# EAGLE board Vernier_Interface_Shield-Panel-v12 (EAGLE 6.6.0)
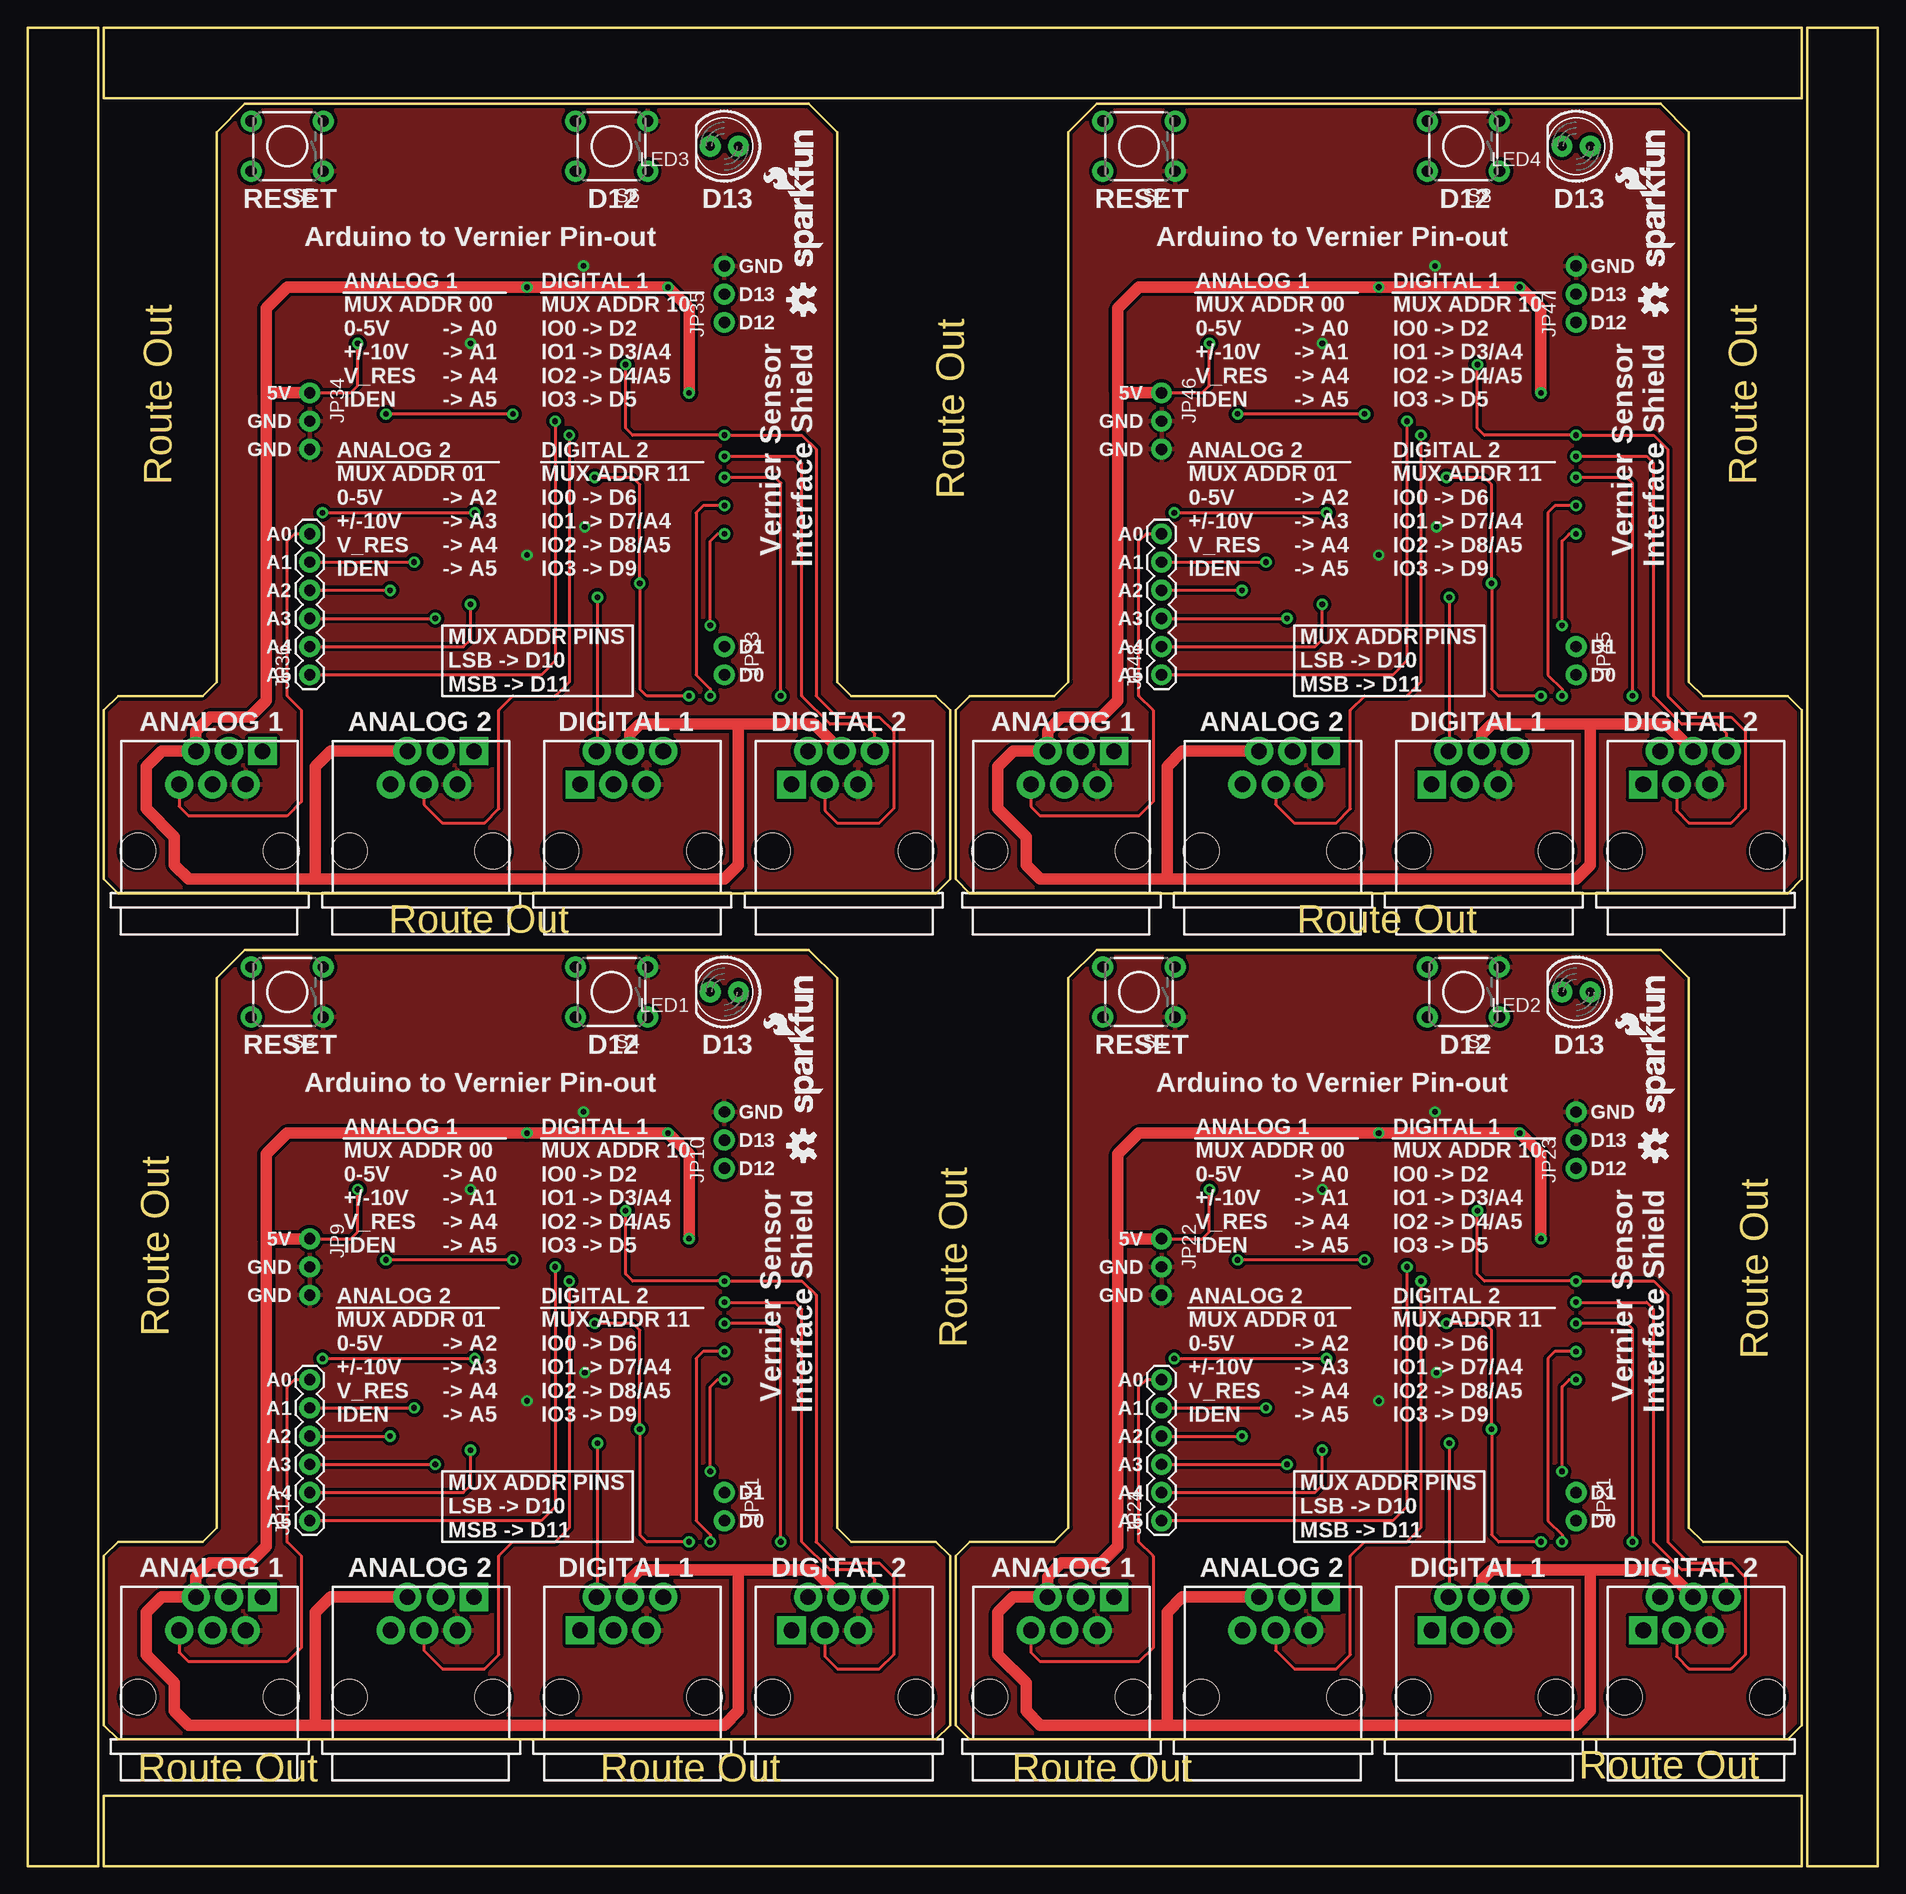
[diagram p0: board, top side]
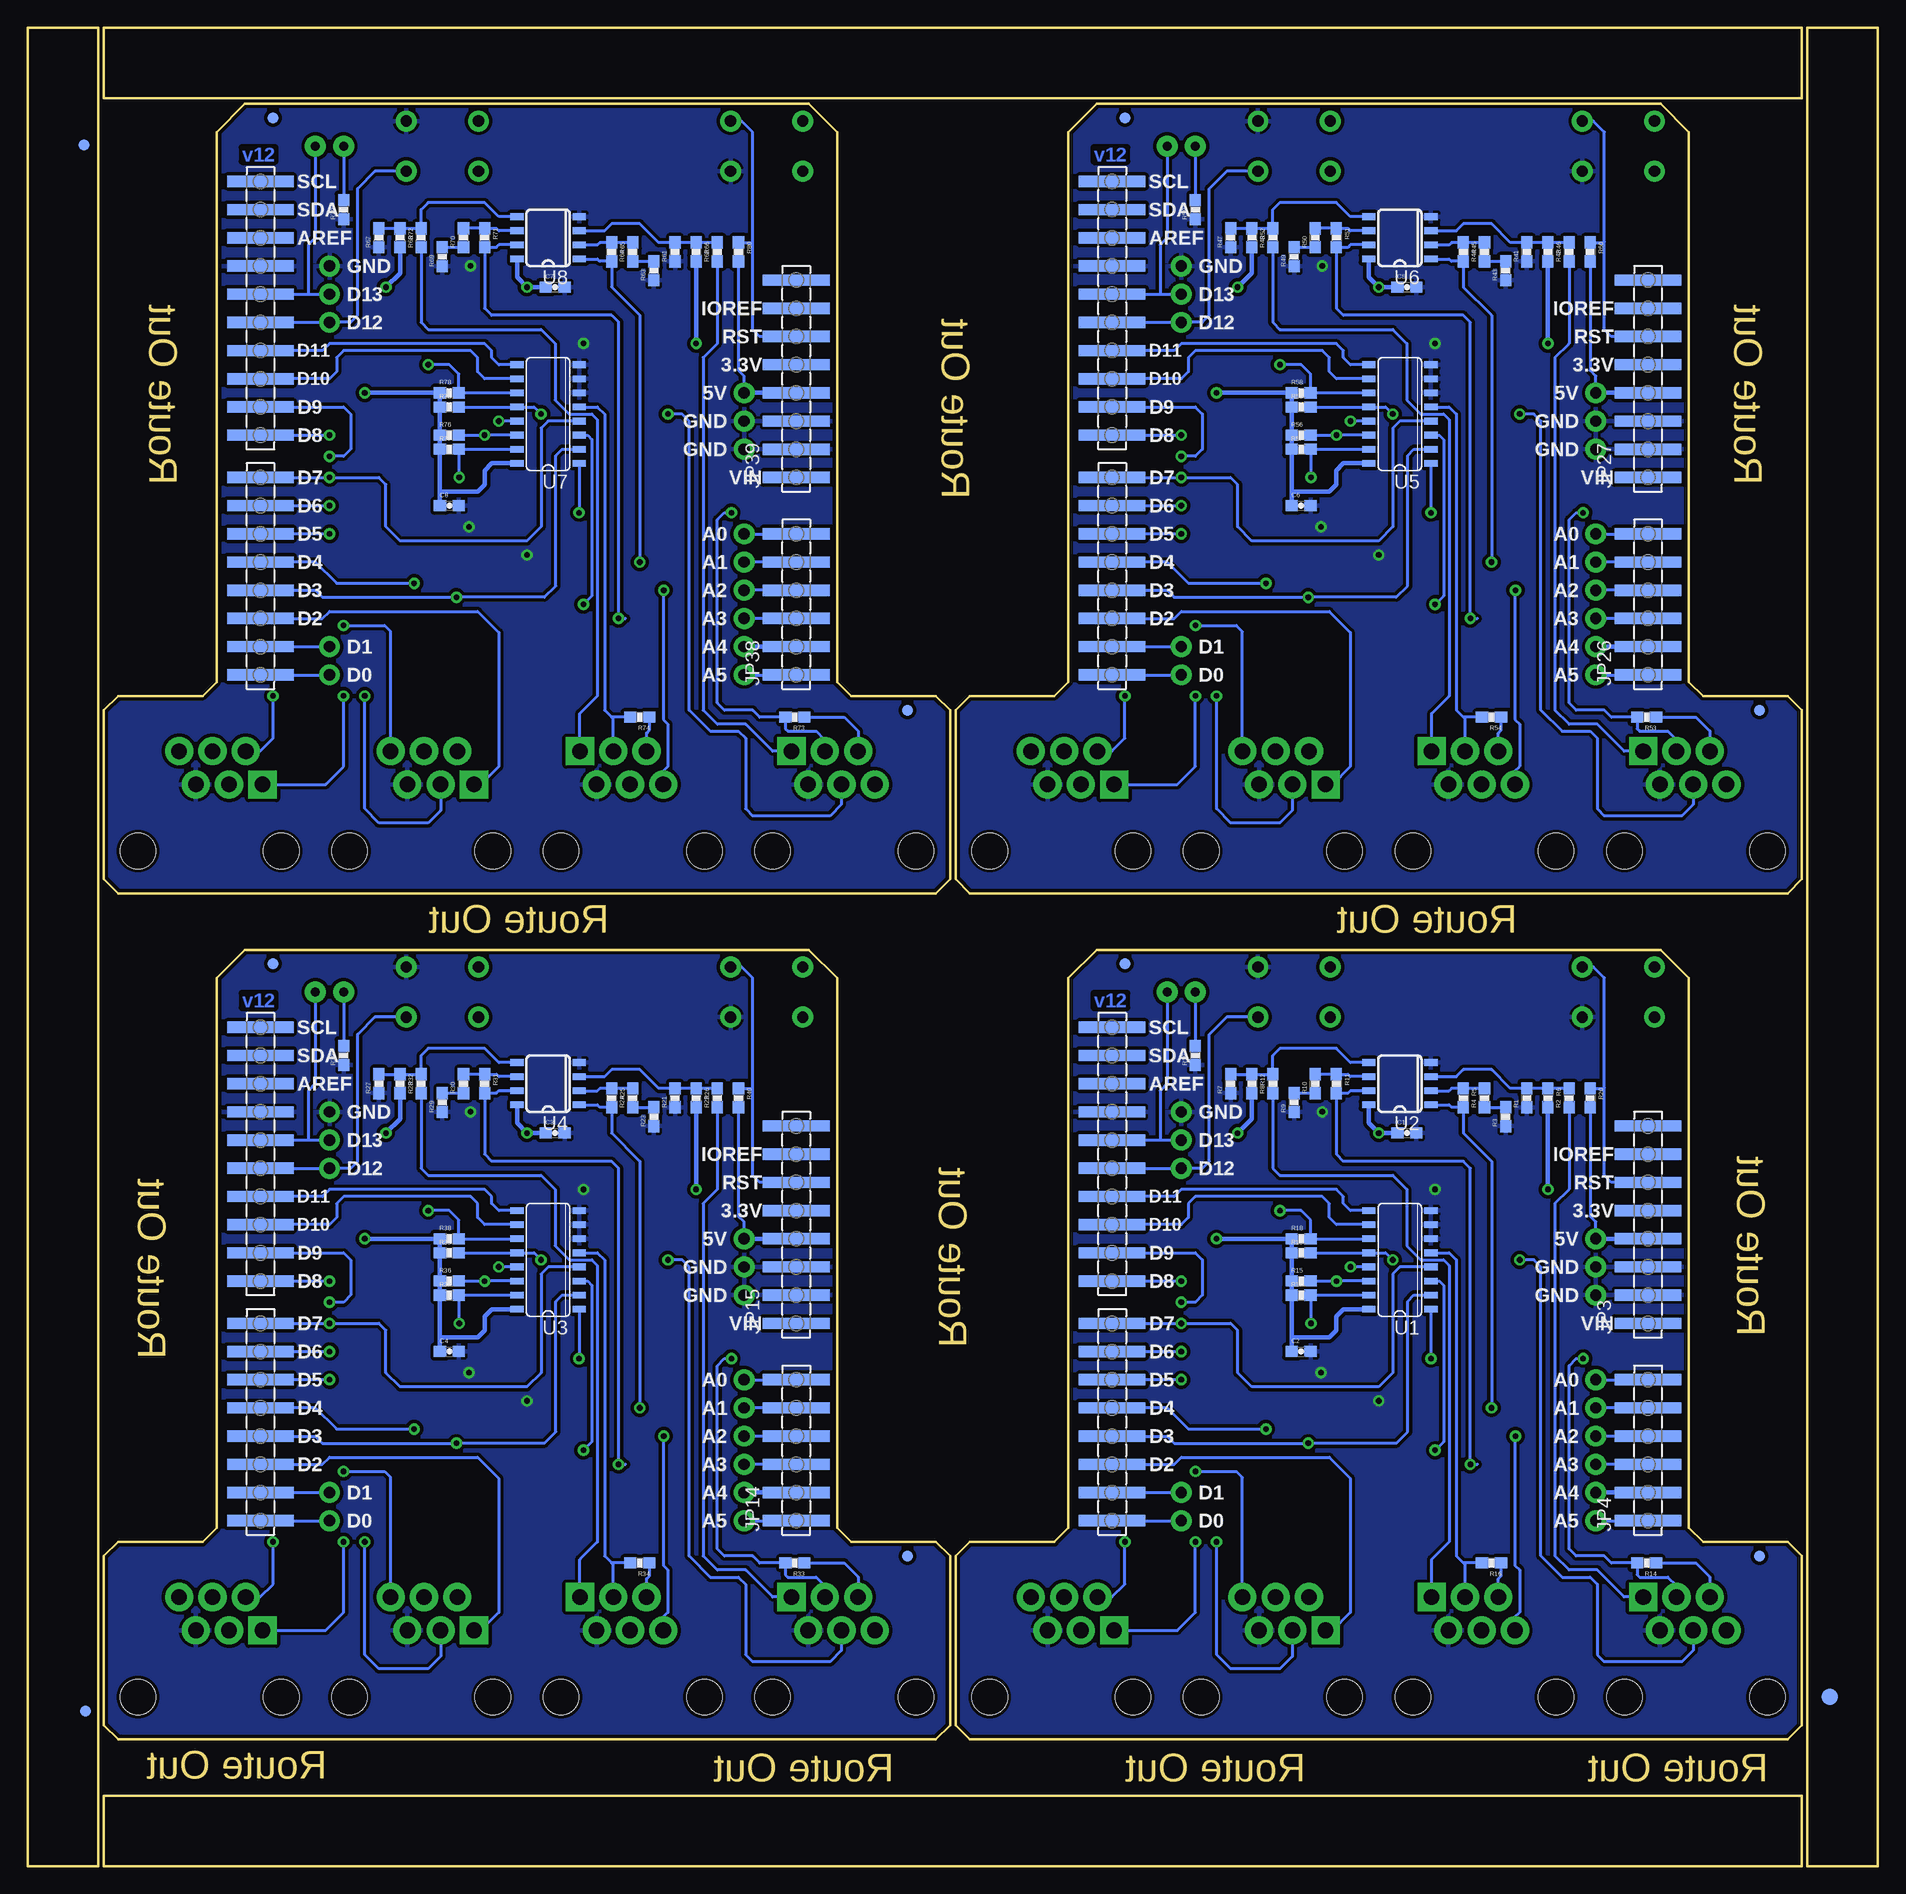
[diagram p1: board, bottom side, seen from below]

Size 166.62 x 165.61 mm. Coordinates in mm from the lower left corner, seen from the top.
Outline: 6.35,83.82 6.35,0 0,0 0,34.29
Outline: 166.62,85.09 166.62,0 160.27,0 160.27,35.56
Outline: 160.27,30.48 160.27,165.61 166.62,165.61 166.62,80.01
Outline: 0,32.77 0,165.61 6.35,165.61 6.35,82.3
Outline: 8.13,11.43 81.79,11.43 83.06,12.7 83.06,27.94 81.79,29.21 74.17,29.21 72.9,30.48 72.9,80.01 70.36,82.55 19.56,82.55 17.02,80.01 17.02,30.48 15.75,29.21 8.13,29.21 6.86,27.94 6.86,12.7 8.13,11.43
Outline: 84.84,11.43 158.5,11.43 159.77,12.7 159.77,27.94 158.5,29.21 150.88,29.21 149.61,30.48 149.61,80.01 147.07,82.55 96.27,82.55 93.73,80.01 93.73,30.48 92.46,29.21 84.84,29.21 83.57,27.94 83.57,12.7 84.84,11.43
Outline: 8.13,87.63 81.79,87.63 83.06,88.9 83.06,104.14 81.79,105.41 74.17,105.41 72.9,106.68 72.9,156.21 70.36,158.75 19.56,158.75 17.02,156.21 17.02,106.68 15.75,105.41 8.13,105.41 6.86,104.14 6.86,88.9 8.13,87.63
Outline: 84.84,87.63 158.5,87.63 159.77,88.9 159.77,104.14 158.5,105.41 150.88,105.41 149.61,106.68 149.61,156.21 147.07,158.75 96.27,158.75 93.73,156.21 93.73,106.68 92.46,105.41 84.84,105.41 83.57,104.14 83.57,88.9 84.84,87.63
Outline: 6.86,6.35 6.86,0 159.77,0 159.77,6.35 6.86,6.35
Outline: 159.77,159.26 159.77,165.61 6.86,165.61 6.86,159.26 159.77,159.26
Copper layers (1*16): Top 0.035mm / dielectric 1.5mm / Bottom 0.035mm
Design rules "SparkFun-2-layer": minimum track width 7mil, minimum drill 15mil, track to track 8mil, track to pad 8mil, pad to pad 8mil, via to via 8mil, smd to smd 8mil, copper to edge 8mil, drill to drill 8mil, minimum pad ring 12mil, minimum via ring 10mil, stop-mask expansion 4mil, vias tented up to drill 20mil, thermal gap 10mil

## Footprints (pad centres in the part's own frame; a part is rotated, then mirrored left to right if it is on the bottom)
0603-CAP = smd 1.1 x 1: 1 -0.85,0; 2 0.85,0
FIDUCIAL-1.5X3 = smd 1.5 x 1.5: 1 0,0
FIDUCIAL-1X2 = smd 1 x 1: 1 0,0
1X10_SMD_MALE = smd 1.02 x 6: 1 0,0; 2 2.54,0; 3 5.08,0; 4 7.62,0; 5 10.16,0; 6 12.7,0; 7 15.24,0; 8 17.78,0; 9 20.32,0; 10 22.86,0
1X08_SMD_MALE = smd 1.02 x 6: 1 0,0; 2 2.54,0; 3 5.08,0; 4 7.62,0; 5 10.16,0; 6 12.7,0; 7 15.24,0; 8 17.78,0
1X06_SMD_MALE = smd 1.02 x 6: 1 0,0; 2 2.54,0; 3 5.08,0; 4 7.62,0; 5 10.16,0; 6 12.7,0
BTA = drill 1.4 pad 2.54 square: 1 4.75,9 | drill 1.4 pad 2.54: 2 3.25,6; 3 1.75,9; 4 0.25,6; 5 -1.25,9; 6 -2.75,6 | hole 3.2: 6.45,0; -6.45,0
BTD = drill 1.4 pad 2.54 square: 1 -4.75,6 | drill 1.4 pad 2.54: 2 -3.25,9; 3 -1.75,6; 4 -0.25,9; 5 1.25,6; 6 2.75,9 | hole 3.2: 6.45,0; -6.45,0
1X03_NO_SILK = drill 1.016 pad 1.88: 1 0,0; 2 2.54,0; 3 5.08,0
1X02_NO_SILK = drill 1.016 pad 1.88: 1 0,0; 2 2.54,0
1X06 = drill 1.016 pad 1.88: 1 0,0; 2 2.54,0; 3 5.08,0; 4 7.62,0; 5 10.16,0; 6 12.7,0
LED5MM = drill 0.813 pad 1.88: A -1.27,0; K 1.27,0
0603-RES = smd 1.1 x 1: 1 -0.85,0; 2 0.85,0
TACTILE-PTH = drill 1.016 pad 1.88: 1 -3.251,2.261; 2 3.251,2.261; 3 -3.251,-2.261; 4 3.251,-2.261
SO16 = smd 0.6 x 1.2: 1 -4.445,-2.8; 2 -3.175,-2.8; 3 -1.905,-2.8; 4 -0.635,-2.8; 5 0.635,-2.8; 6 1.905,-2.8; 7 3.175,-2.8; 8 4.445,-2.8; 9 4.445,2.8; 10 3.175,2.8; 11 1.905,2.8; 12 0.635,2.8; 13 -0.635,2.8; 14 -1.905,2.8; 15 -3.175,2.8; 16 -4.445,2.8
SO08-TIGHT = smd 0.6 x 1.2: 1 -1.905,-2.8; 2 -0.635,-2.8; 3 0.635,-2.8; 4 1.905,-2.8; 5 1.905,2.8; 6 0.635,2.8; 7 -0.635,2.8; 8 -1.905,2.8

## Placement (x,y rotation side)
C1  0.1uF  [0603-CAP]  42.42,66.04 0 bottom
C2  0.1uF  [0603-CAP]  51.94,46.35 0 bottom
C3  0.1uF  [0603-CAP]  119.13,66.04 0 bottom
C4  0.1uF  [0603-CAP]  128.65,46.35 0 bottom
C5  0.1uF  [0603-CAP]  42.42,142.24 0 bottom
C6  0.1uF  [0603-CAP]  51.94,122.56 0 bottom
C7  0.1uF  [0603-CAP]  119.13,142.24 0 bottom
C8  0.1uF  [0603-CAP]  128.65,122.56 0 bottom
E$1  [FIDUCIAL-1.5X3]  4.32,15.24 0 bottom
E$4  [FIDUCIAL-1X2]  161.42,13.97 0 bottom
E$6  [FIDUCIAL-1X2]  161.54,155.07 270 bottom
FID1  FIDUCIAL1X2  [FIDUCIAL-1X2]  10.67,27.94 0 bottom
FID2  FIDUCIAL1X2  [FIDUCIAL-1X2]  67.82,81.28 0 bottom
FID3  FIDUCIAL1X2  [FIDUCIAL-1X2]  87.38,27.94 0 bottom
FID4  FIDUCIAL1X2  [FIDUCIAL-1X2]  144.53,81.28 0 bottom
FID5  FIDUCIAL1X2  [FIDUCIAL-1X2]  10.67,104.14 0 bottom
FID6  FIDUCIAL1X2  [FIDUCIAL-1X2]  67.82,157.48 0 bottom
FID7  FIDUCIAL1X2  [FIDUCIAL-1X2]  87.38,104.14 0 bottom
FID8  FIDUCIAL1X2  [FIDUCIAL-1X2]  144.53,157.48 0 bottom
JP1  Male  [1X10_SMD_MALE]  68.96,52.7 90 bottom
JP2  Male  [1X08_SMD_MALE]  68.96,31.11 90 bottom
JP3  Male  [1X08_SMD_MALE]  20.7,48.9 90 bottom
JP4  Male  [1X06_SMD_MALE]  20.7,31.11 90 bottom
JP5  BTA  [BTA]  16.38,15.24 0 top
JP6  BTA  [BTA]  35.43,15.24 0 top
JP7  BTD  [BTD]  54.48,15.24 0 top
JP8  BTD  [BTD]  73.53,15.24 0 top
JP9  [1X03_NO_SILK]  25.4,56.52 270 top
JP10  [1X03_NO_SILK]  62.74,62.87 90 top
JP11  M021X02_NO_SILK  [1X02_NO_SILK]  62.74,33.66 270 top
JP12  Male  [1X06]  25.4,31.11 90 top
JP13  Male  [1X10_SMD_MALE]  145.67,52.7 90 bottom
JP14  Male  [1X06_SMD_MALE]  97.41,31.11 90 bottom
JP15  Male  [1X08_SMD_MALE]  97.41,48.9 90 bottom
JP16  Male  [1X08_SMD_MALE]  145.67,31.11 90 bottom
JP17  BTD  [BTD]  131.19,15.24 0 top
JP18  BTA  [BTA]  93.09,15.24 0 top
JP19  BTA  [BTA]  112.14,15.24 0 top
JP20  BTD  [BTD]  150.24,15.24 0 top
JP21  M021X02_NO_SILK  [1X02_NO_SILK]  139.45,33.66 270 top
JP22  [1X03_NO_SILK]  102.11,56.52 270 top
JP23  [1X03_NO_SILK]  139.45,62.87 90 top
JP24  Male  [1X06]  102.11,31.11 90 top
JP25  Male  [1X10_SMD_MALE]  68.96,128.91 90 bottom
JP26  Male  [1X06_SMD_MALE]  20.7,107.31 90 bottom
JP27  Male  [1X08_SMD_MALE]  20.7,125.09 90 bottom
JP28  Male  [1X08_SMD_MALE]  68.96,107.31 90 bottom
JP29  BTD  [BTD]  54.48,91.44 0 top
JP30  BTA  [BTA]  16.38,91.44 0 top
JP31  BTA  [BTA]  35.43,91.44 0 top
JP32  BTD  [BTD]  73.53,91.44 0 top
JP33  M021X02_NO_SILK  [1X02_NO_SILK]  62.74,109.86 270 top
JP34  [1X03_NO_SILK]  25.4,132.72 270 top
JP35  [1X03_NO_SILK]  62.74,139.06 90 top
JP36  Male  [1X06]  25.4,107.31 90 top
JP37  Male  [1X10_SMD_MALE]  145.67,128.91 90 bottom
JP38  Male  [1X06_SMD_MALE]  97.41,107.31 90 bottom
JP39  Male  [1X08_SMD_MALE]  97.41,125.09 90 bottom
JP40  Male  [1X08_SMD_MALE]  145.67,107.31 90 bottom
JP41  BTD  [BTD]  131.19,91.44 0 top
JP42  BTA  [BTA]  93.09,91.44 0 top
JP43  BTA  [BTA]  112.14,91.44 0 top
JP44  BTD  [BTD]  150.24,91.44 0 top
JP45  M021X02_NO_SILK  [1X02_NO_SILK]  139.45,109.86 270 top
JP46  [1X03_NO_SILK]  102.11,132.72 270 top
JP47  [1X03_NO_SILK]  139.45,139.06 90 top
JP48  Male  [1X06]  102.11,107.31 90 top
LED1  [LED5MM]  62.74,78.74 180 top
LED2  [LED5MM]  139.45,78.74 180 top
LED3  [LED5MM]  62.74,154.94 180 top
LED4  [LED5MM]  139.45,154.94 180 top
LOGO1  OSHW-LOGOS  [OSHW-LOGO-S]  146.56,64.9 90 top
LOGO2  OSHW-LOGOS  [OSHW-LOGO-S]  69.85,64.9 90 top
LOGO3  OSHW-LOGOS  [OSHW-LOGO-S]  69.85,141.1 90 top
LOGO4  OSHW-LOGOS  [OSHW-LOGO-S]  146.56,141.1 90 top
LOGO_1  LOGO-SFESK  [SFE-LOGO-FLAME]  69.09,74.93 90 top
LOGO_2  LOGO-SFENW2  [SFE-NEW-WEB]  148.34,67.94 90 top
LOGO_3  LOGO-SFENW2  [SFE-NEW-WEB]  71.63,67.94 90 top
LOGO_4  LOGO-SFESK  [SFE-LOGO-FLAME]  145.8,74.93 90 top
LOGO_5  LOGO-SFENW2  [SFE-NEW-WEB]  71.63,144.15 90 top
LOGO_6  LOGO-SFESK  [SFE-LOGO-FLAME]  69.09,151.13 90 top
LOGO_7  LOGO-SFENW2  [SFE-NEW-WEB]  148.34,144.15 90 top
LOGO_8  LOGO-SFESK  [SFE-LOGO-FLAME]  145.8,151.13 90 top
R1  10K  [0603-RES]  31.62,69.22 90 bottom
R2  20k  [0603-RES]  27.81,69.22 90 bottom
R3  20k  [0603-RES]  33.53,67.51 90 bottom
R4  20k  [0603-RES]  35.43,69.22 90 bottom
R5  10K  [0603-RES]  37.34,69.22 270 bottom
R6  10K  [0603-RES]  29.72,69.22 270 bottom
R7  10K  [0603-RES]  58.29,70.48 90 bottom
R8  20k  [0603-RES]  54.48,70.48 90 bottom
R9  20k  [0603-RES]  52.58,68.78 90 bottom
R10  20k  [0603-RES]  50.67,70.48 90 bottom
R11  10K  [0603-RES]  48.77,70.48 270 bottom
R12  10K  [0603-RES]  56.39,70.48 270 bottom
R13  10K  [0603-RES]  51.94,55.24 0 bottom
R14  15K  [0603-RES]  20.83,27.3 180 bottom
R15  10K  [0603-RES]  51.94,52.7 0 bottom
R16  15K  [0603-RES]  34.8,27.3 180 bottom
R17  10K  [0603-RES]  51.94,51.44 0 bottom
R18  10K  [0603-RES]  51.94,56.52 0 bottom
R19  330  [0603-RES]  61.47,73.03 90 bottom
R20  10K  [0603-RES]  25.91,69.22 270 bottom
R21  10K  [0603-RES]  108.33,69.22 90 bottom
R22  20k  [0603-RES]  104.52,69.22 90 bottom
R23  20k  [0603-RES]  110.24,67.51 90 bottom
R24  20k  [0603-RES]  112.14,69.22 90 bottom
R25  10K  [0603-RES]  114.05,69.22 270 bottom
R26  10K  [0603-RES]  106.43,69.22 270 bottom
R27  10K  [0603-RES]  135,70.48 90 bottom
R28  20k  [0603-RES]  131.19,70.48 90 bottom
R29  20k  [0603-RES]  129.29,68.78 90 bottom
R30  20k  [0603-RES]  127.38,70.48 90 bottom
R31  10K  [0603-RES]  125.48,70.48 270 bottom
R32  10K  [0603-RES]  133.1,70.48 270 bottom
R33  15K  [0603-RES]  97.54,27.3 180 bottom
R34  15K  [0603-RES]  111.51,27.3 180 bottom
R35  10K  [0603-RES]  128.65,55.24 0 bottom
R36  10K  [0603-RES]  128.65,52.7 0 bottom
R37  10K  [0603-RES]  128.65,51.44 0 bottom
R38  10K  [0603-RES]  128.65,56.52 0 bottom
R39  330  [0603-RES]  138.18,73.03 90 bottom
R40  10K  [0603-RES]  102.62,69.22 270 bottom
R41  10K  [0603-RES]  31.62,145.41 90 bottom
R42  20k  [0603-RES]  27.81,145.41 90 bottom
R43  20k  [0603-RES]  33.53,143.71 90 bottom
R44  20k  [0603-RES]  35.43,145.41 90 bottom
R45  10K  [0603-RES]  37.34,145.41 270 bottom
R46  10K  [0603-RES]  29.72,145.41 270 bottom
R47  10K  [0603-RES]  58.29,146.69 90 bottom
R48  20k  [0603-RES]  54.48,146.69 90 bottom
R49  20k  [0603-RES]  52.58,144.98 90 bottom
R50  20k  [0603-RES]  50.67,146.69 90 bottom
R51  10K  [0603-RES]  48.77,146.69 270 bottom
R52  10K  [0603-RES]  56.39,146.69 270 bottom
R53  15K  [0603-RES]  20.83,103.5 180 bottom
R54  15K  [0603-RES]  34.8,103.5 180 bottom
R55  10K  [0603-RES]  51.94,131.44 0 bottom
R56  10K  [0603-RES]  51.94,128.91 0 bottom
R57  10K  [0603-RES]  51.94,127.64 0 bottom
R58  10K  [0603-RES]  51.94,132.72 0 bottom
R59  330  [0603-RES]  61.47,149.22 90 bottom
R60  10K  [0603-RES]  25.91,145.41 270 bottom
R61  10K  [0603-RES]  108.33,145.41 90 bottom
R62  20k  [0603-RES]  104.52,145.41 90 bottom
R63  20k  [0603-RES]  110.24,143.71 90 bottom
R64  20k  [0603-RES]  112.14,145.41 90 bottom
R65  10K  [0603-RES]  114.05,145.41 270 bottom
R66  10K  [0603-RES]  106.43,145.41 270 bottom
R67  10K  [0603-RES]  135,146.69 90 bottom
R68  20k  [0603-RES]  131.19,146.69 90 bottom
R69  20k  [0603-RES]  129.29,144.98 90 bottom
R70  20k  [0603-RES]  127.38,146.69 90 bottom
R71  10K  [0603-RES]  125.48,146.69 270 bottom
R72  10K  [0603-RES]  133.1,146.69 270 bottom
R73  15K  [0603-RES]  97.54,103.5 180 bottom
R74  15K  [0603-RES]  111.51,103.5 180 bottom
R75  10K  [0603-RES]  128.65,131.44 0 bottom
R76  10K  [0603-RES]  128.65,128.91 0 bottom
R77  10K  [0603-RES]  128.65,127.64 0 bottom
R78  10K  [0603-RES]  128.65,132.72 0 bottom
R79  330  [0603-RES]  138.18,149.22 90 bottom
R80  10K  [0603-RES]  102.62,145.41 270 bottom
S1  Reset  [TACTILE-PTH]  100.08,78.74 180 top
S2  D12  [TACTILE-PTH]  129.29,78.74 180 top
S3  Reset  [TACTILE-PTH]  23.37,78.74 180 top
S4  D12  [TACTILE-PTH]  52.58,78.74 180 top
S5  Reset  [TACTILE-PTH]  23.37,154.94 180 top
S6  D12  [TACTILE-PTH]  52.58,154.94 180 top
S7  Reset  [TACTILE-PTH]  100.08,154.94 180 top
S8  D12  [TACTILE-PTH]  129.29,154.94 180 top
U1  74HC4052SO  [SO16]  43.05,54.61 90 bottom
U2  LMV358SOICT  [SO08-TIGHT]  43.05,70.48 90 bottom
U3  74HC4052SO  [SO16]  119.76,54.61 90 bottom
U4  LMV358SOICT  [SO08-TIGHT]  119.76,70.48 90 bottom
U5  74HC4052SO  [SO16]  43.05,130.81 90 bottom
U6  LMV358SOICT  [SO08-TIGHT]  43.05,146.69 90 bottom
U7  74HC4052SO  [SO16]  119.76,130.81 90 bottom
U8  LMV358SOICT  [SO08-TIGHT]  119.76,146.69 90 bottom

## Library data of the parts
C1-C8 = SparkFun-Capacitors; PROD_ID: CAP-00810
E$1 = SparkFun-Retired
E$4 E$6 FID1-FID8 LOGO1-LOGO4 LOGO_1-LOGO_8 = SparkFun-Aesthetics
JP1 JP13 JP25 JP37 = SparkFun-Connectors; PROD_ID: CONN-11291
JP2 JP3 JP15 JP16 JP27 JP28 JP39 JP40 = SparkFun-Connectors; PROD_ID: CONN-11292
JP4 JP14 JP26 JP38 = SparkFun-Connectors; PROD_ID: CONN-11293
JP5-JP12 JP17-JP24 JP29-JP36 JP41-JP48 = SparkFun-Connectors
LED1-LED4 = SparkFun-LED
R1 R5-R7 R11-R13 R15 R17 R18 R20 R21 R25-R27 R31 R32 R35-R38 R40 R41 R45-R47 R51 R52 R55-R58 R60 R61 R65-R67 R71 R72 R75-R78 R80 = SparkFun-Resistors; PROD_ID: RES-00824
R2-R4 R8-R10 R22-R24 R28-R30 R42-R44 R48-R50 R62-R64 R68-R70 = SparkFun-Resistors; PROD_ID: RES-09383
R14 R16 R33 R34 R53 R54 R73 R74 = SparkFun-Resistors; PROD_ID: RES-07854
R19 R39 R59 R79 = SparkFun-Resistors; PROD_ID: RES-00818
S1-S8 = SparkFun-Electromechanical
U1 U3 U5 U7 = SparkFun-AnalogIC; PROD_ID: IC-09813
U2 U4 U6 U8 = SparkFun-AnalogIC; PROD_ID: IC-09657

## Nets
0: JP2.1 JP11.2
1: JP2.2 JP11.1
2: JP13.5 JP23.1 S2.1
3: JP16.1 JP21.2
3.3V: JP3.5
3.3V1: JP15.5
3.3V2: JP27.5
3.3V3: JP39.5
4: JP16.2 JP21.1
5: JP13.6 JP23.2 LED2.A
5V: C1.1 C2.1 JP3.4 JP5.5 JP6.5 JP7.4 JP8.4 JP9.1 R6.2 R12.2 R13.1 R14.1 R15.1 R16.1 R17.1 R18.1 R20.2 U1.16 U2.8
5V1: C3.1 C4.1 JP15.4 JP17.4 JP18.5 JP19.5 JP20.4 JP22.1 R26.2 R32.2 R33.1 R34.1 R35.1 R36.1 R37.1 R38.1 R40.2 U3.16 U4.8
5V2: C5.1 C6.1 JP27.4 JP29.4 JP30.5 JP31.5 JP32.4 JP34.1 R46.2 R52.2 R53.1 R54.1 R55.1 R56.1 R57.1 R58.1 R60.2 U5.16 U6.8
5V3: C7.1 C8.1 JP39.4 JP41.4 JP42.5 JP43.5 JP44.4 JP46.1 R66.2 R72.2 R73.1 R74.1 R75.1 R76.1 R77.1 R78.1 R80.2 U7.16 U8.8
6: JP25.5 JP35.1 S6.1
7: JP28.1 JP33.2
8: JP28.2 JP33.1
9: JP25.6 JP35.2 LED3.A
10: JP37.5 JP47.1 S8.1
11: JP40.1 JP45.2
12: JP1.5 JP10.1 S4.1
13: JP1.6 JP10.2 LED1.A
14: JP40.2 JP45.1
15: JP37.6 JP47.2 LED4.A
A1: JP4.5 JP12.5 R5.2 U2.1
A2: JP14.2 JP24.2 U3.3
A3: JP4.3 JP12.3 R11.2 U2.7
A4: JP4.2 JP12.2 U1.3
A5: JP4.1 JP12.1 U1.13
A6: JP14.1 JP24.1 U3.13
A7: JP14.5 JP24.5 R25.2 U4.1
A8: JP14.3 JP24.3 R31.2 U4.7
A9: JP26.2 JP36.2 U5.3
A10: JP26.1 JP36.1 U5.13
A11: JP26.5 JP36.5 R45.2 U6.1
A12: JP26.3 JP36.3 R51.2 U6.7
A13: JP38.2 JP48.2 U7.3
A14: JP38.1 JP48.1 U7.13
A15: JP38.5 JP48.5 R65.2 U8.1
A16: JP38.3 JP48.3 R71.2 U8.7
AREF: JP1.8
AREF1: JP13.8
AREF2: JP25.8
AREF3: JP37.8
AS1_AN1: JP5.1 R2.1
AS1_AN2: JP4.6 JP5.6 JP12.6
AS1_AN3: JP18.1 R22.1
AS1_AN4: JP14.6 JP18.6 JP24.6
AS1_AN5: JP30.1 R42.1
AS1_AN6: JP26.6 JP30.6 JP36.6
AS1_AN7: JP42.1 R62.1
AS1_AN8: JP38.6 JP42.6 JP48.6
AS1_AUTOID: JP5.4 R13.2 U1.12
AS1_AUTOID1: JP18.4 R35.2 U3.12
AS1_AUTOID2: JP30.4 R55.2 U5.12
AS1_AUTOID3: JP42.4 R75.2 U7.12
AS1_VRES: JP5.3 R14.2 U1.1
AS1_VRES1: JP18.3 R33.2 U3.1
AS1_VRES2: JP30.3 R53.2 U5.1
AS1_VRES3: JP42.3 R73.2 U7.1
AS2_AN1: JP6.1 R8.1
AS2_AN2: JP4.4 JP6.6 JP12.4
AS2_AN3: JP14.4 JP19.6 JP24.4
AS2_AN4: JP19.1 R28.1
AS2_AN5: JP26.4 JP31.6 JP36.4
AS2_AN6: JP31.1 R48.1
AS2_AN7: JP38.4 JP43.6 JP48.4
AS2_AN8: JP43.1 R68.1
AS2_AUTOID: JP6.4 R15.2 U1.14
AS2_AUTOID1: JP19.4 R36.2 U3.14
AS2_AUTOID2: JP31.4 R56.2 U5.14
AS2_AUTOID3: JP43.4 R76.2 U7.14
AS2_VRES: JP6.3 R16.2 U1.5
AS2_VRES1: JP19.3 R34.2 U3.5
AS2_VRES2: JP31.3 R54.2 U5.5
AS2_VRES3: JP43.3 R74.2 U7.5
D1_IO0: JP2.3 JP7.1
D1_IO1: JP2.4 JP7.2 U1.2
D1_IO2: JP2.5 JP7.3 R17.2 U1.15
D1_IO3: JP2.6 JP7.6
D1_IO4: JP16.6 JP17.6
D1_IO5: JP16.5 JP17.3 R37.2 U3.15
D1_IO6: JP16.4 JP17.2 U3.2
D1_IO7: JP16.3 JP17.1
D1_IO8: JP28.6 JP29.6
D1_IO9: JP28.5 JP29.3 R57.2 U5.15
D1_IO10: JP28.4 JP29.2 U5.2
D1_IO11: JP28.3 JP29.1
D1_IO12: JP40.6 JP41.6
D1_IO13: JP40.5 JP41.3 R77.2 U7.15
D1_IO14: JP40.4 JP41.2 U7.2
D1_IO15: JP40.3 JP41.1
D2_IO0: JP2.7 JP8.1
D2_IO1: JP2.8 JP8.2 U1.4
D2_IO2: JP1.1 JP8.3 R18.2 U1.11
D2_IO3: JP1.2 JP8.6
D2_IO4: JP13.2 JP20.6
D2_IO5: JP13.1 JP20.3 R38.2 U3.11
D2_IO6: JP16.8 JP20.2 U3.4
D2_IO7: JP16.7 JP20.1
D2_IO8: JP25.2 JP32.6
D2_IO9: JP25.1 JP32.3 R58.2 U5.11
D2_IO10: JP28.8 JP32.2 U5.4
D2_IO11: JP28.7 JP32.1
D2_IO12: JP37.2 JP44.6
D2_IO13: JP37.1 JP44.3 R78.2 U7.11
D2_IO14: JP40.8 JP44.2 U7.4
D2_IO15: JP40.7 JP44.1
GND: C1.2 C2.2 JP1.7 JP3.2 JP3.3 JP5.2 JP6.2 JP7.5 JP8.5 JP9.2 JP9.3 JP10.3 R1.1 R3.1 R7.1 R9.1 R19.1 S3.1 S4.3 U1.6 U1.7 U1.8 U2.4
GND1: C3.2 C4.2 JP13.7 JP15.2 JP15.3 JP17.5 JP18.2 JP19.2 JP20.5 JP22.2 JP22.3 JP23.3 R21.1 R23.1 R27.1 R29.1 R39.1 S1.1 S2.3 U3.6 U3.7 U3.8 U4.4
GND2: C5.2 C6.2 JP25.7 JP27.2 JP27.3 JP29.5 JP30.2 JP31.2 JP32.5 JP34.2 JP34.3 JP35.3 R41.1 R43.1 R47.1 R49.1 R59.1 S5.1 S6.3 U5.6 U5.7 U5.8 U6.4
GND3: C7.2 C8.2 JP37.7 JP39.2 JP39.3 JP41.5 JP42.2 JP43.2 JP44.5 JP46.2 JP46.3 JP47.3 R61.1 R63.1 R67.1 R69.1 R79.1 S7.1 S8.3 U7.6 U7.7 U7.8 U8.4
IOREF: JP3.7
IOREF1: JP15.7
IOREF2: JP27.7
IOREF3: JP39.7
MUX_A0: JP1.3 U1.10
MUX_A1: JP1.4 U1.9
MUX_A2: JP13.3 U3.10
MUX_A3: JP13.4 U3.9
MUX_A4: JP25.3 U5.10
MUX_A5: JP25.4 U5.9
MUX_A6: JP37.3 U7.10
MUX_A7: JP37.4 U7.9
N$1: R1.2 R2.2 R6.1 U2.3
N$2: R3.2 R4.1
N$3: R4.2 R5.1 U2.2
N$4: R23.2 R24.1
N$5: R9.2 R10.1
N$6: R7.2 R8.2 R12.1 U2.5
N$8: R10.2 R11.1 U2.6
N$9: LED1.K R19.2
N$24: R21.2 R22.2 R26.1 U4.3
N$25: R24.2 R25.1 U4.2
N$26: R29.2 R30.1
N$28: R27.2 R28.2 R32.1 U4.5
N$29: R30.2 R31.1 U4.6
N$30: LED2.K R39.2
N$31: R43.2 R44.1
N$32: R41.2 R42.2 R46.1 U6.3
N$33: R44.2 R45.1 U6.2
N$34: R49.2 R50.1
N$35: R47.2 R48.2 R52.1 U6.5
N$36: R50.2 R51.1 U6.6
N$37: LED3.K R59.2
N$38: R63.2 R64.1
N$39: R61.2 R62.2 R66.1 U8.3
N$40: R64.2 R65.1 U8.2
N$41: R69.2 R70.1
N$42: R67.2 R68.2 R72.1 U8.5
N$43: R70.2 R71.1 U8.6
N$44: LED4.K R79.2
RESET: JP3.6 R20.1 S3.3
RESET1: JP15.6 R40.1 S1.3
RESET2: JP27.6 R60.1 S5.3
RESET3: JP39.6 R80.1 S7.3
SCL: JP1.10
SCL1: JP13.10
SCL2: JP25.10
SCL3: JP37.10
SDA: JP1.9
SDA1: JP13.9
SDA2: JP25.9
SDA3: JP37.9
VIN: JP3.1
VIN1: JP15.1
VIN2: JP27.1
VIN3: JP39.1

## Tracks (layer width: path | path; a pad name or v marks a point on that pad's centre or on a via)
0
  Bottom 0.254: JP2.1 JP11.2
1
  Bottom 0.254: JP2.2 JP11.1
2
  Bottom 0.254: JP13.5 JP23.1 137.54,62.87 136.91,63.5 136.91,74.93 135.36,76.48 S2.1
3
  Bottom 0.254: JP16.1 JP21.2
4
  Bottom 0.254: JP16.2 JP21.1
5
  Bottom 0.254: JP13.6 141.35,65.41 | 141.35,65.41 JP23.2 | LED2.A 140.72,70.48 141.35,69.85 141.35,65.41
5V  (via drill 0.51)
  Top 0.254: JP9.1 29.08,56.52 29.72,57.15 v29.72,60.96
  Top 1.016: 21.46,56.52 JP9.1 | 64.01,26.67 55.12,26.67 54.23,25.79 JP7.4 | 64.01,26.67 70.85,26.67 JP8.4 | JP6.5 27.29,24.24 25.91,22.86 25.91,12.7 | 25.91,12.7 14.48,12.7 13.21,13.97 13.21,16.51 10.67,19.05 10.67,22.86 12.05,24.24 JP5.5 15.13,26.05 16.38,27.3 R14.1 21.46,28.79 21.46,56.52 | 25.91,12.7 62.74,12.7 64.01,13.97 64.01,26.67 | 21.46,56.52 21.46,64.14 23.37,66.04 v44.96,66.04 v57.66,66.04 59.56,64.14 v59.56,56.52
  Bottom 0.254: R14.1 16.38,27.3 15.13,26.05 JP5.5 | JP6.5 34.18,25.89 33.95,26.12 R16.1 | R20.2 25.91,58.55 25.4,58.04 JP9.1
  Bottom 0.406: 52.79,47.62 R17.1 R15.1 R13.1 R18.1 v59.56,56.52 | 52.79,47.62 C2.1 | U1.16 48.13,50.16 48.77,49.53 48.77,48.26 49.4,47.62 52.79,47.62 | R6.2 v29.72,60.96 | C1.1 v44.96,66.04 45.85,66.94 U2.8 | JP3.4 JP9.1 | R12.2 56.39,67.31 v57.66,66.04
5V1  (via drill 0.51)
  Top 0.254: JP22.1 105.79,56.52 106.43,57.15 v106.43,60.96
  Top 1.016: 98.17,56.52 JP22.1 | 140.72,26.67 131.83,26.67 130.94,25.79 JP17.4 | 140.72,26.67 147.56,26.67 JP20.4 | JP19.5 104,24.24 102.62,22.86 102.62,12.7 | 102.62,12.7 91.19,12.7 89.92,13.97 89.92,16.51 87.38,19.05 87.38,22.86 88.76,24.24 JP18.5 91.84,26.05 93.09,27.3 R33.1 98.17,28.79 98.17,56.52 | 102.62,12.7 139.45,12.7 140.72,13.97 140.72,26.67 | 98.17,56.52 98.17,64.14 100.08,66.04 v121.67,66.04 v134.37,66.04 136.27,64.14 v136.27,56.52
  Bottom 0.254: R33.1 93.09,27.3 91.84,26.05 JP18.5 | JP19.5 110.89,25.89 110.66,26.12 R34.1 | R40.2 102.62,58.55 102.11,58.04 JP22.1
  Bottom 0.406: 129.5,47.62 R37.1 R36.1 R35.1 R38.1 v136.27,56.52 | 129.5,47.62 C4.1 | U3.16 124.84,50.16 125.48,49.53 125.48,48.26 126.11,47.62 129.5,47.62 | R26.2 v106.43,60.96 | C3.1 v121.67,66.04 122.56,66.94 U4.8 | JP15.4 JP22.1 | R32.2 133.1,67.31 v134.37,66.04
5V2  (via drill 0.51)
  Top 0.254: JP34.1 29.08,132.72 29.72,133.35 v29.72,137.16
  Top 1.016: 21.46,132.72 JP34.1 | 64.01,102.87 55.12,102.87 54.23,101.98 JP29.4 | 64.01,102.87 70.85,102.87 JP32.4 | JP31.5 27.29,100.44 25.91,99.06 25.91,88.9 | 25.91,88.9 14.48,88.9 13.21,90.17 13.21,92.71 10.67,95.25 10.67,99.06 12.05,100.44 JP30.5 15.13,102.25 16.38,103.5 R53.1 21.46,104.99 21.46,132.72 | 25.91,88.9 62.74,88.9 64.01,90.17 64.01,102.87 | 21.46,132.72 21.46,140.34 23.37,142.24 v44.96,142.24 v57.66,142.24 59.56,140.34 v59.56,132.72
  Bottom 0.254: R53.1 16.38,103.5 15.13,102.25 JP30.5 | JP31.5 34.18,102.09 33.95,102.32 R54.1 | R60.2 25.91,134.75 25.4,134.24 JP34.1
  Bottom 0.406: 52.79,123.83 R57.1 R56.1 R55.1 R58.1 v59.56,132.72 | 52.79,123.83 C6.1 | U5.16 48.13,126.36 48.77,125.73 48.77,124.46 49.4,123.83 52.79,123.83 | R46.2 v29.72,137.16 | C5.1 v44.96,142.24 45.85,143.13 U6.8 | JP27.4 JP34.1 | R52.2 56.39,143.51 v57.66,142.24
5V3  (via drill 0.51)
  Top 0.254: JP46.1 105.79,132.72 106.43,133.35 v106.43,137.16
  Top 1.016: 98.17,132.72 JP46.1 | 140.72,102.87 131.83,102.87 130.94,101.98 JP41.4 | 140.72,102.87 147.56,102.87 JP44.4 | JP43.5 104,100.44 102.62,99.06 102.62,88.9 | 102.62,88.9 91.19,88.9 89.92,90.17 89.92,92.71 87.38,95.25 87.38,99.06 88.76,100.44 JP42.5 91.84,102.25 93.09,103.5 R73.1 98.17,104.99 98.17,132.72 | 102.62,88.9 139.45,88.9 140.72,90.17 140.72,102.87 | 98.17,132.72 98.17,140.34 100.08,142.24 v121.67,142.24 v134.37,142.24 136.27,140.34 v136.27,132.72
  Bottom 0.254: R73.1 93.09,103.5 91.84,102.25 JP42.5 | JP43.5 110.89,102.09 110.66,102.32 R74.1 | R80.2 102.62,134.75 102.11,134.24 JP46.1
  Bottom 0.406: 129.5,123.83 R77.1 R76.1 R75.1 R78.1 v136.27,132.72 | 129.5,123.83 C8.1 | U7.16 124.84,126.36 125.48,125.73 125.48,124.46 126.11,123.83 129.5,123.83 | R66.2 v106.43,137.16 | C7.1 v121.67,142.24 122.56,143.13 U8.8 | JP39.4 JP46.1 | R72.2 133.1,143.51 v134.37,142.24
6
  Bottom 0.254: JP25.5 JP35.1 60.83,139.06 60.2,139.7 60.2,151.13 58.65,152.68 S6.1
7
  Bottom 0.254: JP28.1 JP33.2
8
  Bottom 0.254: JP28.2 JP33.1
9
  Bottom 0.254: JP25.6 64.64,141.6 | 64.64,141.6 JP35.2 | LED3.A 64.01,146.69 64.64,146.05 64.64,141.6
10
  Bottom 0.254: JP37.5 JP47.1 137.54,139.06 136.91,139.7 136.91,151.13 135.36,152.68 S8.1
11
  Bottom 0.254: JP40.1 JP45.2
12
  Bottom 0.254: JP1.5 JP10.1 60.83,62.87 60.2,63.5 60.2,74.93 58.65,76.48 S4.1
13
  Bottom 0.254: JP1.6 64.64,65.41 | 64.64,65.41 JP10.2 | LED1.A 64.01,70.48 64.64,69.85 64.64,65.41
14
  Bottom 0.254: JP40.2 JP45.1
15
  Bottom 0.254: JP37.6 141.35,141.6 | 141.35,141.6 JP47.2 | LED4.A 140.72,146.69 141.35,146.05 141.35,141.6
A1  (via drill 0.51)
  Top 0.254: JP12.5 v34.8,41.27
  Bottom 0.254: v34.8,41.27 34.8,63.5 37.34,66.04 R5.2 38.39,68.36 38.61,68.58 U2.1 | JP4.5 JP12.5
A2  (via drill 0.51)
  Top 0.254: JP24.2 115.95,33.66 116.59,34.29 v116.59,37.47
  Bottom 0.254: U3.3 116.2,52.7 115.82,52.32 115.82,38.23 v116.59,37.47
  Bottom 0.406: JP24.2 JP14.2
A3  (via drill 0.51)
  Top 0.254: JP12.3 v36.7,36.2
  Bottom 0.254: U2.7 47.5,69.85 47.71,69.64 R11.2 48.77,64.14 48.13,63.5 37.34,63.5 36.7,62.87 v36.7,36.2 36.07,36.2 | JP4.3 JP12.3
A4  (via drill 0.51)
  Top 0.254: JP12.2 39.24,33.66 39.88,34.29 v39.88,37.47
  Bottom 0.254: U1.3 39.5,52.7 39.12,52.32 39.12,38.23 v39.88,37.47
  Bottom 0.406: JP12.2 JP4.2
A5  (via drill 0.51)
  Top 0.254: v47.5,53.98 47.5,32.38 46.23,31.11 JP12.1
  Bottom 0.254: U1.13 v47.5,53.98 | JP12.1 JP4.1
A6  (via drill 0.51)
  Top 0.254: v124.21,53.98 124.21,32.38 122.94,31.11 JP24.1
  Bottom 0.254: U3.13 v124.21,53.98 | JP24.1 JP14.1
A7  (via drill 0.51)
  Top 0.254: JP24.5 v111.51,41.27
  Bottom 0.254: v111.51,41.27 111.51,63.5 114.05,66.04 R25.2 115.1,68.36 115.32,68.58 U4.1 | JP14.5 JP24.5
A8  (via drill 0.51)
  Top 0.254: JP24.3 v113.41,36.2
  Bottom 0.254: U4.7 124.21,69.85 124.42,69.64 R31.2 125.48,64.14 124.84,63.5 114.05,63.5 113.41,62.87 v113.41,36.2 112.78,36.2 | JP14.3 JP24.3
A9  (via drill 0.51)
  Top 0.254: JP36.2 39.24,109.86 39.88,110.49 v39.88,113.67
  Bottom 0.254: U5.3 39.5,128.91 39.12,128.52 39.12,114.43 v39.88,113.67
  Bottom 0.406: JP36.2 JP26.2
A10  (via drill 0.51)
  Top 0.254: v47.5,130.18 47.5,108.58 46.23,107.31 JP36.1
  Bottom 0.254: U5.13 v47.5,130.18 | JP36.1 JP26.1
A11  (via drill 0.51)
  Top 0.254: JP36.5 v34.8,117.47
  Bottom 0.254: v34.8,117.47 34.8,139.7 37.34,142.24 R45.2 38.39,144.56 38.61,144.78 U6.1 | JP26.5 JP36.5
A12  (via drill 0.51)
  Top 0.254: JP36.3 v36.7,112.39
  Bottom 0.254: U6.7 47.5,146.05 47.71,145.84 R51.2 48.77,140.34 48.13,139.7 37.34,139.7 36.7,139.06 v36.7,112.39 36.07,112.39 | JP26.3 JP36.3
A13  (via drill 0.51)
  Top 0.254: JP48.2 115.95,109.86 116.59,110.49 v116.59,113.67
  Bottom 0.254: U7.3 116.2,128.91 115.82,128.52 115.82,114.43 v116.59,113.67
  Bottom 0.406: JP48.2 JP38.2
A14  (via drill 0.51)
  Top 0.254: v124.21,130.18 124.21,108.58 122.94,107.31 JP48.1
  Bottom 0.254: U7.13 v124.21,130.18 | JP48.1 JP38.1
A15  (via drill 0.51)
  Top 0.254: JP48.5 v111.51,117.47
  Bottom 0.254: v111.51,117.47 111.51,139.7 114.05,142.24 R65.2 115.1,144.56 115.32,144.78 U8.1 | JP38.5 JP48.5
A16  (via drill 0.51)
  Top 0.254: JP48.3 v113.41,112.39
  Bottom 0.254: U8.7 124.21,146.05 124.42,145.84 R71.2 125.48,140.34 124.84,139.7 114.05,139.7 113.41,139.06 v113.41,112.39 112.78,112.39 | JP38.3 JP48.3
AS1_AN1
  Bottom 0.254: R2.1 27.81,60.96 29.08,59.69 29.08,27.94 27.81,26.67 25.27,26.67 22.84,24.24 JP5.1
AS1_AN2
  Top 0.254: JP5.6 13.63,19.26 14.48,18.41 23.37,18.41 24.64,19.68 24.64,27.94 23.37,29.21 23.37,43.18 24,43.81 JP12.6
  Bottom 0.254: JP12.6 JP4.6
AS1_AN3
  Bottom 0.254: R22.1 104.52,60.96 105.79,59.69 105.79,27.94 104.52,26.67 101.98,26.67 99.55,24.24 JP18.1
AS1_AN4
  Top 0.254: JP18.6 90.34,19.26 91.19,18.41 100.08,18.41 101.35,19.68 101.35,27.94 100.08,29.21 100.08,43.18 100.71,43.81 JP24.6
  Bottom 0.254: JP24.6 JP14.6
AS1_AN5
  Bottom 0.254: R42.1 27.81,137.16 29.08,135.89 29.08,104.14 27.81,102.87 25.27,102.87 22.84,100.44 JP30.1
AS1_AN6
  Top 0.254: JP30.6 13.63,95.46 14.48,94.61 23.37,94.61 24.64,95.89 24.64,104.14 23.37,105.41 23.37,119.38 24,120.02 JP36.6
  Bottom 0.254: JP36.6 JP26.6
AS1_AN7
  Bottom 0.254: R62.1 104.52,137.16 105.79,135.89 105.79,104.14 104.52,102.87 101.98,102.87 99.55,100.44 JP42.1
AS1_AN8
  Top 0.254: JP42.6 90.34,95.46 91.19,94.61 100.08,94.61 101.35,95.89 101.35,104.14 100.08,105.41 100.08,119.38 100.71,120.02 JP48.6
  Bottom 0.254: JP48.6 JP38.6
AS1_AUTOID  (via drill 0.51)
  Top 0.254: v43.69,54.61 v32.26,54.61
  Bottom 0.254: R13.2 U1.12 44.32,55.24 v43.69,54.61 | JP5.4 16.63,19.43 17.65,18.41 24.64,18.41 25.27,19.05 25.27,25.4 25.91,26.04 28.45,26.04 30.35,27.94 30.35,53.98 30.99,54.61 v32.26,54.61
AS1_AUTOID1  (via drill 0.51)
  Top 0.254: v120.4,54.61 v108.97,54.61
  Bottom 0.254: R35.2 U3.12 121.03,55.24 v120.4,54.61 | JP18.4 93.34,19.43 94.36,18.41 101.35,18.41 101.98,19.05 101.98,25.4 102.62,26.04 105.16,26.04 107.06,27.94 107.06,53.98 107.7,54.61 v108.97,54.61
AS1_AUTOID2  (via drill 0.51)
  Top 0.254: v43.69,130.81 v32.26,130.81
  Bottom 0.254: R55.2 U5.12 44.32,131.44 v43.69,130.81 | JP30.4 16.63,95.64 17.65,94.61 24.64,94.61 25.27,95.25 25.27,101.6 25.91,102.23 28.45,102.23 30.35,104.14 30.35,130.18 30.99,130.81 v32.26,130.81
AS1_AUTOID3  (via drill 0.51)
  Top 0.254: v120.4,130.81 v108.97,130.81
  Bottom 0.254: R75.2 U7.12 121.03,131.44 v120.4,130.81 | JP42.4 93.34,95.64 94.36,94.61 101.35,94.61 101.98,95.25 101.98,101.6 102.62,102.23 105.16,102.23 107.06,104.14 107.06,130.18 107.7,130.81 v108.97,130.81
AS1_VRES  (via drill 0.51)
  Top 0.254: v26.54,45.72 v40.26,45.72
  Bottom 0.254: JP5.3 18.13,25.25 18.92,26.04 21.46,26.04 21.68,26.25 R14.2 24,27.3 24.64,27.94 27.18,27.94 27.81,28.57 27.81,45.09 27.18,45.72 v26.54,45.72 | U1.1 v40.25,45.73 v40.26,45.72
AS1_VRES1  (via drill 0.51)
  Top 0.254: v103.25,45.72 v116.97,45.72
  Bottom 0.254: JP18.3 94.84,25.25 95.63,26.04 98.17,26.04 98.39,26.25 R33.2 100.71,27.3 101.35,27.94 103.89,27.94 104.52,28.57 104.52,45.09 103.89,45.72 v103.25,45.72 | U3.1 v116.96,45.73 v116.97,45.72
AS1_VRES2  (via drill 0.51)
  Top 0.254: v26.54,121.92 v40.26,121.92
  Bottom 0.254: JP30.3 18.13,101.44 18.92,102.23 21.46,102.23 21.68,102.45 R53.2 24,103.5 24.64,104.14 27.18,104.14 27.81,104.78 27.81,121.28 27.18,121.92 v26.54,121.92 | U5.1 v40.25,121.93 v40.26,121.92
AS1_VRES3  (via drill 0.51)
  Top 0.254: v103.25,121.92 v116.97,121.92
  Bottom 0.254: JP42.3 94.84,101.44 95.63,102.23 98.17,102.23 98.39,102.45 R73.2 100.71,103.5 101.35,104.14 103.89,104.14 104.52,104.78 104.52,121.28 103.89,121.92 v103.25,121.92 | U7.1 v116.96,121.93 v116.97,121.92
AS2_AN1
  Bottom 0.254: R8.1 54.48,62.87 53.85,62.23 43.69,62.23 42.42,60.96 42.42,55.88 41.15,54.61 39.12,54.61 38.61,54.1 38.61,29.21 40.18,27.64 JP6.1
AS2_AN2  (via drill 0.51)
  Top 0.254: JP12.4 v32.64,38.73
  Bottom 0.254: JP4.4 JP12.4 | v32.64,38.73 32.68,38.69 32.68,27.09 32.26,26.67 32.26,22.86 32.68,22.43 JP6.6
AS2_AN3  (via drill 0.51)
  Top 0.254: JP24.4 v109.35,38.73
  Bottom 0.254: JP14.4 JP24.4 | v109.35,38.73 109.39,38.69 109.39,27.09 108.97,26.67 108.97,22.86 109.39,22.43 JP19.6
AS2_AN4
  Bottom 0.254: R28.1 131.19,62.87 130.56,62.23 120.4,62.23 119.13,60.96 119.13,55.88 117.86,54.61 115.82,54.61 115.32,54.1 115.32,29.21 116.89,27.64 JP19.1
AS2_AN5  (via drill 0.51)
  Top 0.254: JP36.4 v32.64,114.94
  Bottom 0.254: JP26.4 JP36.4 | v32.64,114.94 32.68,114.89 32.68,103.3 32.26,102.87 32.26,99.06 32.68,98.64 JP31.6
AS2_AN6
  Bottom 0.254: R48.1 54.48,139.06 53.85,138.43 43.69,138.43 42.42,137.16 42.42,132.08 41.15,130.81 39.12,130.81 38.61,130.3 38.61,105.41 40.18,103.83 JP31.1
AS2_AN7  (via drill 0.51)
  Top 0.254: JP48.4 v109.35,114.94
  Bottom 0.254: JP38.4 JP48.4 | v109.35,114.94 109.39,114.89 109.39,103.3 108.97,102.87 108.97,99.06 109.39,98.64 JP43.6
AS2_AN8
  Bottom 0.254: R68.1 131.19,139.06 130.56,138.43 120.4,138.43 119.13,137.16 119.13,132.08 117.86,130.81 115.82,130.81 115.32,130.3 115.32,105.41 116.89,103.83 JP43.1
AS2_AUTOID  (via drill 0.51)
  Top 0.254: v48.77,52.7 48.77,30.48 47.5,29.21 43.69,29.21 42.42,27.94 42.42,19.05 41.15,17.78 37.34,17.78 35.68,19.43 JP6.4
  Bottom 0.254: R15.2 v48.77,52.7 U1.14
AS2_AUTOID1  (via drill 0.51)
  Top 0.254: v125.48,52.7 125.48,30.48 124.21,29.21 120.4,29.21 119.13,27.94 119.13,19.05 117.86,17.78 114.05,17.78 112.39,19.43 JP19.4
  Bottom 0.254: R36.2 v125.48,52.7 U3.14
AS2_AUTOID2  (via drill 0.51)
  Top 0.254: v48.77,128.91 48.77,106.68 47.5,105.41 43.69,105.41 42.42,104.14 42.42,95.25 41.15,93.98 37.34,93.98 35.68,95.64 JP31.4
  Bottom 0.254: R56.2 v48.77,128.91 U5.14
AS2_AUTOID3  (via drill 0.51)
  Top 0.254: v125.48,128.91 125.48,106.68 124.21,105.41 120.4,105.41 119.13,104.14 119.13,95.25 117.86,93.98 114.05,93.98 112.39,95.64 JP43.4
  Bottom 0.254: R76.2 v125.48,128.91 U7.14
AS2_VRES
  Bottom 0.254: U1.5 38.61,55.24 37.97,54.61 37.97,27.94 37.34,27.3 37.21,27.3 | R16.2 37.21,27.3 | JP6.3 37.18,27.28 37.21,27.3
AS2_VRES1
  Bottom 0.254: U3.5 115.32,55.24 114.68,54.61 114.68,27.94 114.05,27.3 113.92,27.3 | R34.2 113.92,27.3 | JP19.3 113.89,27.28 113.92,27.3
AS2_VRES2
  Bottom 0.254: U5.5 38.61,131.44 37.97,130.81 37.97,104.14 37.34,103.5 37.21,103.5 | R54.2 37.21,103.5 | JP31.3 37.18,103.48 37.21,103.5
AS2_VRES3
  Bottom 0.254: U7.5 115.32,131.44 114.68,130.81 114.68,104.14 114.05,103.5 113.92,103.5 | R74.2 113.92,103.5 | JP43.3 113.89,103.48 113.92,103.5
D1_IO0
  Bottom 0.254: JP7.1 49.12,21.24 47.5,22.86 47.5,34.92 49.4,36.83 62.74,36.83 63.37,36.2 JP2.3
D1_IO1  (via drill 0.51)
  Top 0.254: v51.31,38.1 51.31,24.32 JP7.2
  Bottom 0.254: U1.2 41.78,51.44 42.36,50.86 42.36,39.12 43.38,38.1 v51.31,38.1 63.37,38.1 64.01,38.73 JP2.4
D1_IO2  (via drill 0.51)
  Top 0.254: v51.05,48.9 54.48,48.9 55.12,48.26 v55.12,39.37 55.12,29.84 55.75,29.21 v59.56,29.21
  Bottom 0.254: U1.15 R17.2 51.09,48.93 v51.05,48.9 | v55.12,39.37 62.1,39.37 64.01,41.27 JP2.5 | v59.56,29.21 59.56,19.05 58.29,17.78 53.85,17.78 52.73,18.89 JP7.3
D1_IO3  (via drill 0.51)
  Top 0.254: v61.47,35.56 61.47,43.18 62.1,43.81 v62.74,43.81
  Bottom 0.254: v62.74,43.81 JP2.6 | v61.47,35.56 57.78,35.56 57.23,35.01 JP7.6
D1_IO4  (via drill 0.51)
  Top 0.254: v138.18,35.56 138.18,43.18 138.81,43.81 v139.45,43.81
  Bottom 0.254: v139.45,43.81 JP16.6 | v138.18,35.56 134.49,35.56 133.94,35.01 JP17.6
D1_IO5  (via drill 0.51)
  Top 0.254: v127.76,48.9 131.19,48.9 131.83,48.26 v131.83,39.37 131.83,29.84 132.46,29.21 v136.27,29.21
  Bottom 0.254: U3.15 R37.2 127.8,48.93 v127.76,48.9 | v131.83,39.37 138.81,39.37 140.72,41.27 JP16.5 | v136.27,29.21 136.27,19.05 135,17.78 130.56,17.78 129.44,18.89 JP17.3
D1_IO6  (via drill 0.51)
  Top 0.254: v128.02,38.1 128.02,24.32 JP17.2
  Bottom 0.254: U3.2 118.49,51.44 119.07,50.86 119.07,39.12 120.09,38.1 v128.02,38.1 140.08,38.1 140.72,38.73 JP16.4
D1_IO7
  Bottom 0.254: JP17.1 125.83,21.24 124.21,22.86 124.21,34.92 126.11,36.83 139.45,36.83 140.08,36.2 JP16.3
D1_IO8  (via drill 0.51)
  Top 0.254: v61.47,111.76 61.47,119.38 62.1,120.02 v62.74,120.02
  Bottom 0.254: v62.74,120.02 JP28.6 | v61.47,111.76 57.78,111.76 57.23,111.21 JP29.6
D1_IO9  (via drill 0.51)
  Top 0.254: v51.05,125.09 54.48,125.09 55.12,124.46 v55.12,115.57 55.12,106.05 55.75,105.41 v59.56,105.41
  Bottom 0.254: U5.15 R57.2 51.09,125.13 v51.05,125.09 | v55.12,115.57 62.1,115.57 64.01,117.47 JP28.5 | v59.56,105.41 59.56,95.25 58.29,93.98 53.85,93.98 52.73,95.09 JP29.3
D1_IO10  (via drill 0.51)
  Top 0.254: v51.31,114.3 51.31,100.52 JP29.2
  Bottom 0.254: U5.2 41.78,127.64 42.36,127.06 42.36,115.32 43.38,114.3 v51.31,114.3 63.37,114.3 64.01,114.94 JP28.4
D1_IO11
  Bottom 0.254: JP29.1 49.12,97.44 47.5,99.06 47.5,111.12 49.4,113.03 62.74,113.03 63.37,112.39 JP28.3
D1_IO12  (via drill 0.51)
  Top 0.254: v138.18,111.76 138.18,119.38 138.81,120.02 v139.45,120.02
  Bottom 0.254: v139.45,120.02 JP40.6 | v138.18,111.76 134.49,111.76 133.94,111.21 JP41.6
D1_IO13  (via drill 0.51)
  Top 0.254: v127.76,125.09 131.19,125.09 131.83,124.46 v131.83,115.57 131.83,106.05 132.46,105.41 v136.27,105.41
  Bottom 0.254: U7.15 R77.2 127.8,125.13 v127.76,125.09 | v131.83,115.57 138.81,115.57 140.72,117.47 JP40.5 | v136.27,105.41 136.27,95.25 135,93.98 130.56,93.98 129.44,95.09 JP41.3
D1_IO14  (via drill 0.51)
  Top 0.254: v128.02,114.3 128.02,100.52 JP41.2
  Bottom 0.254: U7.2 118.49,127.64 119.07,127.06 119.07,115.32 120.09,114.3 v128.02,114.3 140.08,114.3 140.72,114.94 JP40.4
D1_IO15
  Bottom 0.254: JP41.1 125.83,97.44 124.21,99.06 124.21,111.12 126.11,113.03 139.45,113.03 140.08,112.39 JP40.3
D2_IO0  (via drill 0.51)
  Top 0.254: v61.47,29.21 61.47,29.84 60.2,31.11 60.2,45.72 60.83,46.35 v62.74,46.35
  Bottom 0.254: JP2.7 v62.74,46.35 | JP8.1 63.09,21.24 61.47,22.86 v61.47,29.21
D2_IO1  (via drill 0.51)
  Top 0.254: v67.82,29.21 67.82,48.39 67.31,48.9 v62.74,48.9
  Bottom 0.254: JP8.2 68.98,24.24 67.82,25.4 v67.82,29.21 | U1.4 43.05,53.98 43.69,53.34 43.69,44.45 44.96,43.18 56.39,43.18 57.66,44.45 57.66,48.26 58.29,48.9 v62.74,48.9 JP2.8
D2_IO2  (via drill 0.51)
  Top 0.254: JP8.3 71.78,18.89 72.9,17.78 76.71,17.78 77.98,19.05 77.98,26.04 76.71,27.3 72.9,27.3 70.99,29.21 70.99,51.44 69.72,52.7 v62.74,52.7 54.48,52.7 53.85,53.34 v53.85,59.05
  Bottom 0.254: U1.11 R18.2 51.09,58.2 51.94,59.05 v53.85,59.05 | JP1.1 v62.74,52.7
D2_IO3  (via drill 0.51)
  Top 0.254: v62.74,50.8 69.09,50.8 69.72,50.16 69.72,29.21 72.26,26.67 75.44,26.67 76.28,25.82 JP8.6
  Bottom 0.254: JP1.2 61.47,55.24 60.83,54.61 60.83,51.44 61.47,50.8 v62.74,50.8
D2_IO4  (via drill 0.51)
  Top 0.254: v139.45,50.8 145.8,50.8 146.43,50.16 146.43,29.21 148.97,26.67 152.15,26.67 152.99,25.82 JP20.6
  Bottom 0.254: JP13.2 138.18,55.24 137.54,54.61 137.54,51.44 138.18,50.8 v139.45,50.8
D2_IO5  (via drill 0.51)
  Top 0.254: JP20.3 148.49,18.89 149.61,17.78 153.42,17.78 154.69,19.05 154.69,26.04 153.42,27.3 149.61,27.3 147.7,29.21 147.7,51.44 146.43,52.7 v139.45,52.7 131.19,52.7 130.56,53.34 v130.56,59.05
  Bottom 0.254: U3.11 R38.2 127.8,58.2 128.65,59.05 v130.56,59.05 | JP13.1 v139.45,52.7
D2_IO6  (via drill 0.51)
  Top 0.254: v144.53,29.21 144.53,48.39 144.02,48.9 v139.45,48.9
  Bottom 0.254: JP20.2 145.69,24.24 144.53,25.4 v144.53,29.21 | U3.4 119.76,53.98 120.4,53.34 120.4,44.45 121.67,43.18 133.1,43.18 134.37,44.45 134.37,48.26 135,48.9 v139.45,48.9 JP16.8
D2_IO7  (via drill 0.51)
  Top 0.254: v138.18,29.21 138.18,29.84 136.91,31.11 136.91,45.72 137.54,46.35 v139.45,46.35
  Bottom 0.254: JP16.7 v139.45,46.35 | JP20.1 139.8,21.24 138.18,22.86 v138.18,29.21
D2_IO8  (via drill 0.51)
  Top 0.254: v62.74,127 69.09,127 69.72,126.36 69.72,105.41 72.26,102.87 75.44,102.87 76.28,102.03 JP32.6
  Bottom 0.254: JP25.2 61.47,131.44 60.83,130.81 60.83,127.64 61.47,127 v62.74,127
D2_IO9  (via drill 0.51)
  Top 0.254: JP32.3 71.78,95.09 72.9,93.98 76.71,93.98 77.98,95.25 77.98,102.23 76.71,103.5 72.9,103.5 70.99,105.41 70.99,127.64 69.72,128.91 v62.74,128.91 54.48,128.91 53.85,129.54 v53.85,135.25
  Bottom 0.254: U5.11 R58.2 51.09,134.41 51.94,135.25 v53.85,135.25 | JP25.1 v62.74,128.91
D2_IO10  (via drill 0.51)
  Top 0.254: v67.82,105.41 67.82,124.59 67.31,125.09 v62.74,125.09
  Bottom 0.254: JP32.2 68.98,100.44 67.82,101.6 v67.82,105.41 | U5.4 43.05,130.18 43.69,129.54 43.69,120.65 44.96,119.38 56.39,119.38 57.66,120.65 57.66,124.46 58.29,125.09 v62.74,125.09 JP28.8
D2_IO11  (via drill 0.51)
  Top 0.254: v61.47,105.41 61.47,106.05 60.2,107.31 60.2,121.92 60.83,122.56 v62.74,122.56
  Bottom 0.254: JP28.7 v62.74,122.56 | JP32.1 63.09,97.44 61.47,99.06 v61.47,105.41
D2_IO12  (via drill 0.51)
  Top 0.254: v139.45,127 145.8,127 146.43,126.36 146.43,105.41 148.97,102.87 152.15,102.87 152.99,102.03 JP44.6
  Bottom 0.254: JP37.2 138.18,131.44 137.54,130.81 137.54,127.64 138.18,127 v139.45,127
D2_IO13  (via drill 0.51)
  Top 0.254: JP44.3 148.49,95.09 149.61,93.98 153.42,93.98 154.69,95.25 154.69,102.23 153.42,103.5 149.61,103.5 147.7,105.41 147.7,127.64 146.43,128.91 v139.45,128.91 131.19,128.91 130.56,129.54 v130.56,135.25
  Bottom 0.254: U7.11 R78.2 127.8,134.41 128.65,135.25 v130.56,135.25 | JP37.1 v139.45,128.91
D2_IO14  (via drill 0.51)
  Top 0.254: v144.53,105.41 144.53,124.59 144.02,125.09 v139.45,125.09
  Bottom 0.254: JP44.2 145.69,100.44 144.53,101.6 v144.53,105.41 | U7.4 119.76,130.18 120.4,129.54 120.4,120.65 121.67,119.38 133.1,119.38 134.37,120.65 134.37,124.46 135,125.09 v139.45,125.09 JP40.8
D2_IO15  (via drill 0.51)
  Top 0.254: v138.18,105.41 138.18,106.05 136.91,107.31 136.91,121.92 137.54,122.56 v139.45,122.56
  Bottom 0.254: JP40.7 v139.45,122.56 | JP44.1 139.8,97.44 138.18,99.06 v138.18,105.41
GND  (via drill 0.51)
  other vias: 50.16,44.45 50.04,67.94 39.88,60.96 44.96,41.91
  pour Bottom (isolate 0.305): 17.02,80.01 19.56,82.55 70.36,82.55 72.9,80.01 72.9,30.48 74.17,29.21 81.79,29.21 83.06,27.94 83.06,12.7 81.79,11.43 8.13,11.43 6.99,12.57 6.86,12.57 6.86,27.94 8.13,29.21 15.75,29.21 17.02,30.48
  pour Top (isolate 0.305): 17.02,80.01 19.56,82.55 70.36,82.55 72.9,80.01 72.9,30.48 74.17,29.21 81.79,29.21 83.06,27.94 83.06,12.7 81.79,11.43 8.13,11.43 8.28,11.46 8.13,11.46 6.86,12.6 6.86,27.94 8.13,29.21 15.75,29.21 17.02,30.48
GND1  (via drill 0.51)
  other vias: 126.87,44.45 126.75,67.94 116.59,60.96 121.67,41.91
  pour Bottom (isolate 0.305): 93.73,80.01 96.27,82.55 147.07,82.55 149.61,80.01 149.61,30.48 150.88,29.21 158.5,29.21 159.77,27.94 159.77,12.7 158.5,11.43 84.84,11.43 83.69,12.57 83.57,12.57 83.57,27.94 84.84,29.21 92.46,29.21 93.73,30.48
  pour Top (isolate 0.305): 93.73,80.01 96.27,82.55 147.07,82.55 149.61,80.01 149.61,30.48 150.88,29.21 158.5,29.21 159.77,27.94 159.77,12.7 158.5,11.43 84.84,11.43 84.99,11.46 84.84,11.46 83.57,12.6 83.57,27.94 84.84,29.21 92.46,29.21 93.73,30.48
GND2  (via drill 0.51)
  other vias: 50.16,120.65 50.04,144.15 39.88,137.16 44.96,118.11
  pour Bottom (isolate 0.305): 17.02,156.21 19.56,158.75 70.36,158.75 72.9,156.21 72.9,106.68 74.17,105.41 81.79,105.41 83.06,104.14 83.06,88.9 81.79,87.63 8.13,87.63 6.99,88.77 6.86,88.77 6.86,104.14 8.13,105.41 15.75,105.41 17.02,106.68
  pour Top (isolate 0.305): 17.02,156.21 19.56,158.75 70.36,158.75 72.9,156.21 72.9,106.68 74.17,105.41 81.79,105.41 83.06,104.14 83.06,88.9 81.79,87.63 8.13,87.63 8.28,87.66 8.13,87.66 6.86,88.8 6.86,104.14 8.13,105.41 15.75,105.41 17.02,106.68
GND3  (via drill 0.51)
  other vias: 126.87,120.65 126.75,144.15 116.59,137.16 121.67,118.11
  pour Bottom (isolate 0.305): 93.73,156.21 96.27,158.75 147.07,158.75 149.61,156.21 149.61,106.68 150.88,105.41 158.5,105.41 159.77,104.14 159.77,88.9 158.5,87.63 84.84,87.63 83.69,88.77 83.57,88.77 83.57,104.14 84.84,105.41 92.46,105.41 93.73,106.68
  pour Top (isolate 0.305): 93.73,156.21 96.27,158.75 147.07,158.75 149.61,156.21 149.61,106.68 150.88,105.41 158.5,105.41 159.77,104.14 159.77,88.9 158.5,87.63 84.84,87.63 84.99,87.66 84.84,87.66 83.57,88.8 83.57,104.14 84.84,105.41 92.46,105.41 93.73,106.68
MUX_A0
  Bottom 0.254: U1.10 48.77,57.78 49.4,58.42 49.4,59.69 50.04,60.33 61.47,60.33 62.1,59.69 62.1,58.42 62.74,57.78 JP1.3
MUX_A1
  Bottom 0.254: U1.9 47.5,59.05 48.13,59.69 48.13,60.33 48.77,60.96 62.74,60.96 63.37,60.33 JP1.4
MUX_A2
  Bottom 0.254: U3.10 125.48,57.78 126.11,58.42 126.11,59.69 126.75,60.33 138.18,60.33 138.81,59.69 138.81,58.42 139.45,57.78 JP13.3
MUX_A3
  Bottom 0.254: U3.9 124.21,59.05 124.84,59.69 124.84,60.33 125.48,60.96 139.45,60.96 140.08,60.33 JP13.4
MUX_A4
  Bottom 0.254: U5.10 48.77,133.99 49.4,134.62 49.4,135.89 50.04,136.53 61.47,136.53 62.1,135.89 62.1,134.62 62.74,133.99 JP25.3
MUX_A5
  Bottom 0.254: U5.9 47.5,135.25 48.13,135.89 48.13,136.53 48.77,137.16 62.74,137.16 63.37,136.53 JP25.4
MUX_A6
  Bottom 0.254: U7.10 125.48,133.99 126.11,134.62 126.11,135.89 126.75,136.53 138.18,136.53 138.81,135.89 138.81,134.62 139.45,133.99 JP37.3
MUX_A7
  Bottom 0.254: U7.9 124.21,135.25 124.84,135.89 124.84,136.53 125.48,137.16 139.45,137.16 140.08,136.53 JP37.4
N$1
  Bottom 0.254: R2.2 R6.1 R1.2 33.11,70.06 34.8,71.75 37.34,71.75 37.97,71.12 U2.3
N$2
  Bottom 0.254: R4.1 R3.2
N$3
  Bottom 0.254: R4.2 R5.1 38.39,70.06 38.61,69.85 U2.2
N$4
  Bottom 0.254: R24.1 R23.2
N$5
  Bottom 0.254: R9.2 R10.1
N$6
  Bottom 0.254: U2.5 47.5,72.39 48.77,73.66 53.85,73.66 54.48,73.03 R8.2 R12.1 R7.2
N$8
  Bottom 0.254: U2.6 47.5,71.12 47.71,71.33 R11.1 R10.2
N$9
  Bottom 0.254: LED1.K R19.2
N$24
  Bottom 0.254: R22.2 R26.1 R21.2 109.82,70.06 111.51,71.75 114.05,71.75 114.68,71.12 U4.3
N$25
  Bottom 0.254: R24.2 R25.1 115.1,70.06 115.32,69.85 U4.2
N$26
  Bottom 0.254: R29.2 R30.1
N$28
  Bottom 0.254: U4.5 124.21,72.39 125.48,73.66 130.56,73.66 131.19,73.03 R28.2 R32.1 R27.2
N$29
  Bottom 0.254: U4.6 124.21,71.12 124.42,71.33 R31.1 R30.2
N$30
  Bottom 0.254: LED2.K R39.2
N$31
  Bottom 0.254: R44.1 R43.2
N$32
  Bottom 0.254: R42.2 R46.1 R41.2 33.11,146.26 34.8,147.96 37.34,147.96 37.97,147.32 U6.3
N$33
  Bottom 0.254: R44.2 R45.1 38.39,146.26 38.61,146.05 U6.2
N$34
  Bottom 0.254: R49.2 R50.1
N$35
  Bottom 0.254: U6.5 47.5,148.59 48.77,149.86 53.85,149.86 54.48,149.22 R48.2 R52.1 R47.2
N$36
  Bottom 0.254: U6.6 47.5,147.32 47.71,147.53 R51.1 R50.2
N$37
  Bottom 0.254: LED3.K R59.2
N$38
  Bottom 0.254: R64.1 R63.2
N$39
  Bottom 0.254: R62.2 R66.1 R61.2 109.82,146.26 111.51,147.96 114.05,147.96 114.68,147.32 U8.3
N$40
  Bottom 0.254: R64.2 R65.1 115.1,146.26 115.32,146.05 U8.2
N$41
  Bottom 0.254: R69.2 R70.1
N$42
  Bottom 0.254: U8.5 124.21,148.59 125.48,149.86 130.56,149.86 131.19,149.22 R68.2 R72.1 R67.2
N$43
  Bottom 0.254: U8.6 124.21,147.32 124.42,147.53 R71.1 R70.2
N$44
  Bottom 0.254: LED4.K R79.2
RESET
  Bottom 0.254: JP3.6 24,61.59 24.64,62.23 24.64,70.1 | 24.64,70.1 24.64,80.01 25.63,81 S3.3 | R20.1 24.68,70.06 24.64,70.1
RESET1
  Bottom 0.254: JP15.6 100.71,61.59 101.35,62.23 101.35,70.1 | 101.35,70.1 101.35,80.01 102.34,81 S1.3 | R40.1 101.39,70.06 101.35,70.1
RESET2
  Bottom 0.254: JP27.6 24,137.79 24.64,138.43 24.64,146.3 | 24.64,146.3 24.64,156.21 25.63,157.2 S5.3 | R60.1 24.68,146.26 24.64,146.3
RESET3
  Bottom 0.254: JP39.6 100.71,137.79 101.35,138.43 101.35,146.3 | 101.35,146.3 101.35,156.21 102.34,157.2 S7.3 | R80.1 101.39,146.26 101.35,146.3

## Text on the board
Bottom: v12 | v12 | v12 | v12
Dimension: Route Out | Route Out | Route Out | Route Out | Route Out | Route Out | Route Out | Route Out | Route Out | Route Out | Route Out | Route Out
tPlace: RESET | D12 | D13 | RESET | D12 | D13 | Arduino to Vernier Pin-out | Arduino to Vernier Pin-out | GND | GND | D13 | D13 | D12 | D12 | Vernier Sensor / Interface Shield | Vernier Sensor / Interface Shield | 5V | 5V | ANALOG 1 / MUX ADDR 00 / 0-5V / +/-10V / V_RES / IDEN | -> A0 / -> A1 / -> A4 / -> A5 | DIGITAL 1 / MUX ADDR 10 / IO0 -> D2 / IO1 -> D3/A4 / IO2 -> D4/A5 / IO3 -> D5 | ANALOG 1 / MUX ADDR 00 / 0-5V / +/-10V / V_RES / IDEN | -> A0 / -> A1 / -> A4 / -> A5 | DIGITAL 1 / MUX ADDR 10 / IO0 -> D2 / IO1 -> D3/A4 / IO2 -> D4/A5 / IO3 -> D5 | GND | GND | GND | GND | A0 | A0 | A1 | A1 | ANALOG 2 / MUX ADDR 01 / 0-5V / +/-10V / V_RES / IDEN | -> A2 / -> A3 / -> A4 / -> A5 | DIGITAL 2 / MUX ADDR 11 / IO0 -> D6 / IO1 -> D7/A4 / IO2 -> D8/A5 / IO3 -> D9 | ANALOG 2 / MUX ADDR 01 / 0-5V / +/-10V / V_RES / IDEN | -> A2 / -> A3 / -> A4 / -> A5 | DIGITAL 2 / MUX ADDR 11 / IO0 -> D6 / IO1 -> D7/A4 / IO2 -> D8/A5 / IO3 -> D9 | A2 | A2 | A3 | A3 | A4 | D1 | A4 | D1 | A5 | D0 | A5 | D0 | MUX ADDR PINS / LSB -> D10 / MSB -> D11 | MUX ADDR PINS / LSB -> D10 / MSB -> D11 | ANALOG 1 | ANALOG 2 | DIGITAL 1 | DIGITAL 2 | ANALOG 1 | ANALOG 2 | DIGITAL 1 | DIGITAL 2 | RESET | D12 | D13 | RESET | D12 | D13 | Arduino to Vernier Pin-out | Arduino to Vernier Pin-out | GND | GND | D13 | D13 | D12 | D12 | Vernier Sensor / Interface Shield | Vernier Sensor / Interface Shield | 5V | 5V | ANALOG 1 / MUX ADDR 00 / 0-5V / +/-10V / V_RES / IDEN | -> A0 / -> A1 / -> A4 / -> A5 | DIGITAL 1 / MUX ADDR 10 / IO0 -> D2 / IO1 -> D3/A4 / IO2 -> D4/A5 / IO3 -> D5 | ANALOG 1 / MUX ADDR 00 / 0-5V / +/-10V / V_RES / IDEN | -> A0 / -> A1 / -> A4 / -> A5 | DIGITAL 1 / MUX ADDR 10 / IO0 -> D2 / IO1 -> D3/A4 / IO2 -> D4/A5 / IO3 -> D5 | GND | GND | GND | GND | A0 | A0 | A1 | A1 | ANALOG 2 / MUX ADDR 01 / 0-5V / +/-10V / V_RES / IDEN | -> A2 / -> A3 / -> A4 / -> A5 | DIGITAL 2 / MUX ADDR 11 / IO0 -> D6 / IO1 -> D7/A4 / IO2 -> D8/A5 / IO3 -> D9 | ANALOG 2 / MUX ADDR 01 / 0-5V / +/-10V / V_RES / IDEN | -> A2 / -> A3 / -> A4 / -> A5 | DIGITAL 2 / MUX ADDR 11 / IO0 -> D6 / IO1 -> D7/A4 / IO2 -> D8/A5 / IO3 -> D9 | A2 | A2 | A3 | A3 | A4 | D1 | A4 | D1 | A5 | D0 | A5 | D0 | MUX ADDR PINS / LSB -> D10 / MSB -> D11 | MUX ADDR PINS / LSB -> D10 / MSB -> D11 | ANALOG 1 | ANALOG 2 | DIGITAL 1 | DIGITAL 2 | ANALOG 1 | ANALOG 2 | DIGITAL 1 | DIGITAL 2
bPlace: SCL | SCL | SDA | SDA | AREF | AREF | GND | GND | D13 | D13 | IOREF | IOREF | D12 | D12 | RST | RST | D11 | D11 | 3.3V | 3.3V | D10 | D10 | 5V | 5V | D9 | D9 | GND | GND | D8 | D8 | GND | GND | VIN | D7 | VIN | D7 | D6 | D6 | A0 | D5 | A0 | D5 | A1 | D4 | A1 | D4 | A2 | D3 | A2 | D3 | A3 | D2 | A3 | D2 | A4 | D1 | A4 | D1 | A5 | D0 | A5 | D0 | SCL | SCL | SDA | SDA | AREF | AREF | GND | GND | D13 | D13 | IOREF | IOREF | D12 | D12 | RST | RST | D11 | D11 | 3.3V | 3.3V | D10 | D10 | 5V | 5V | D9 | D9 | GND | GND | D8 | D8 | GND | GND | VIN | D7 | VIN | D7 | D6 | D6 | A0 | D5 | A0 | D5 | A1 | D4 | A1 | D4 | A2 | D3 | A2 | D3 | A3 | D2 | A3 | D2 | A4 | D1 | A4 | D1 | A5 | D0 | A5 | D0